# Altium PCB Kay PCB.PcbDoc
Units mil, origin at the board's own origin, x right, y up, seen from the top; angles counter-clockwise.
Board outline 1350 x 1380 mil, 2 copper layers (Top Layer, Bottom Layer); 29 components, 18 nets, 59 pads, 0 vias.
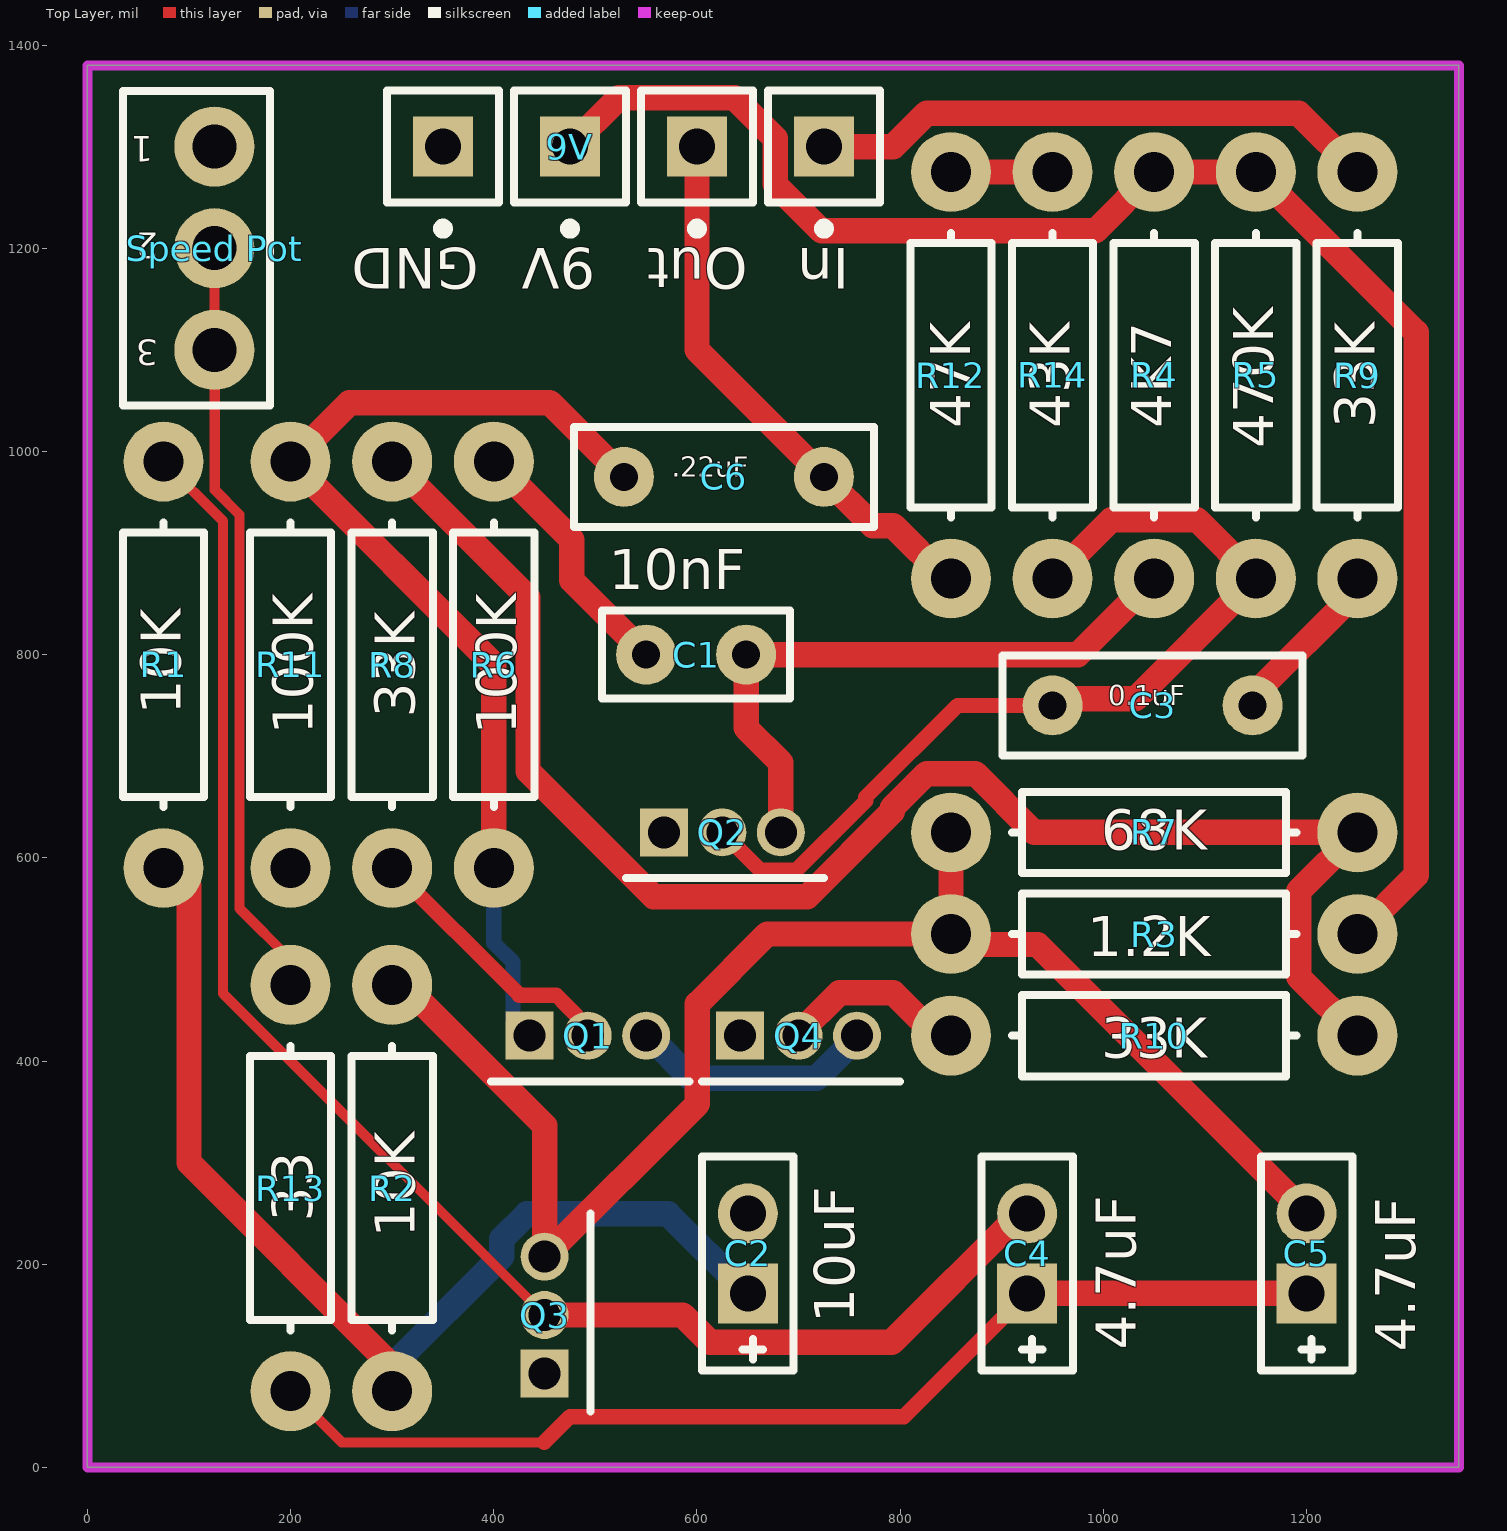
[diagram p0: Top Layer view]
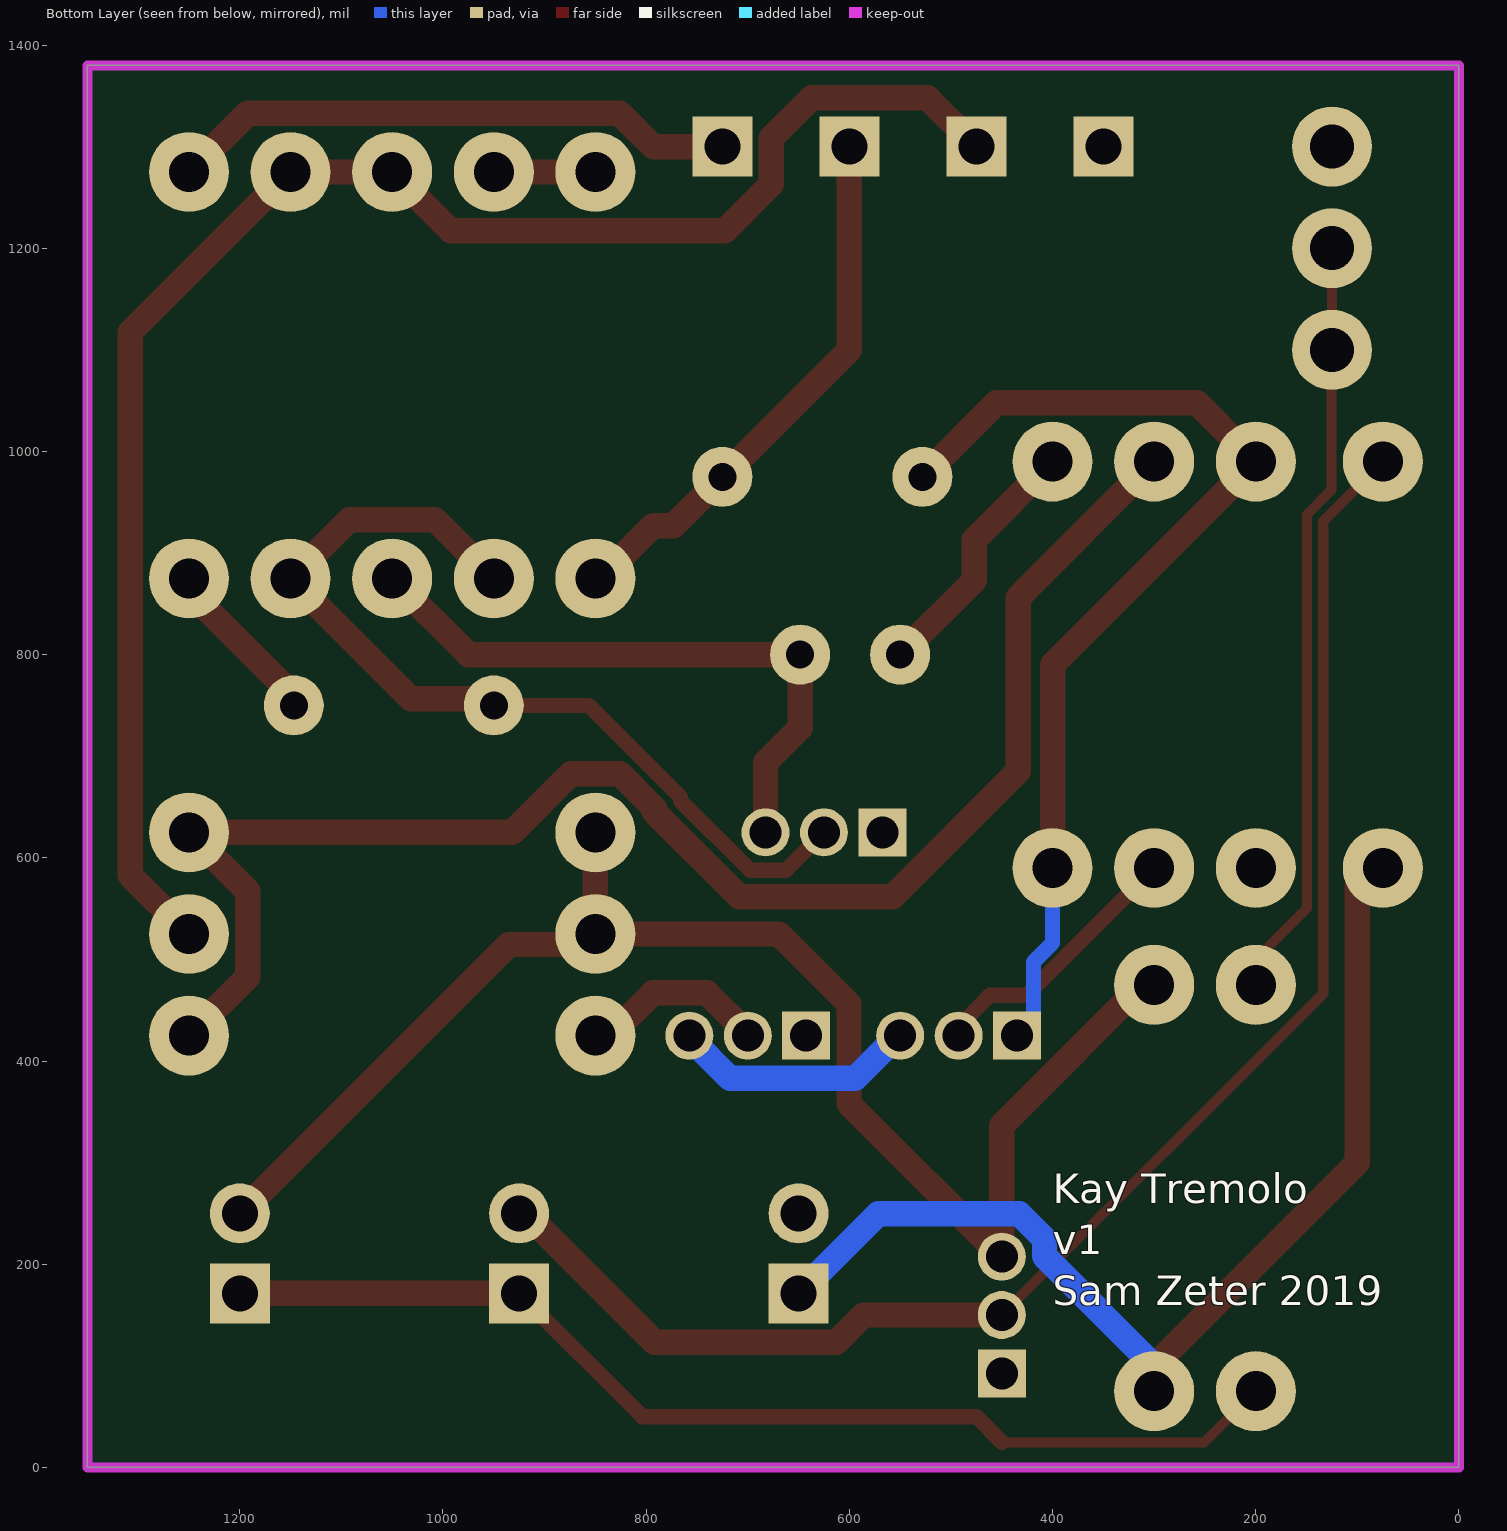
[diagram p1: Bottom Layer view, seen from below]
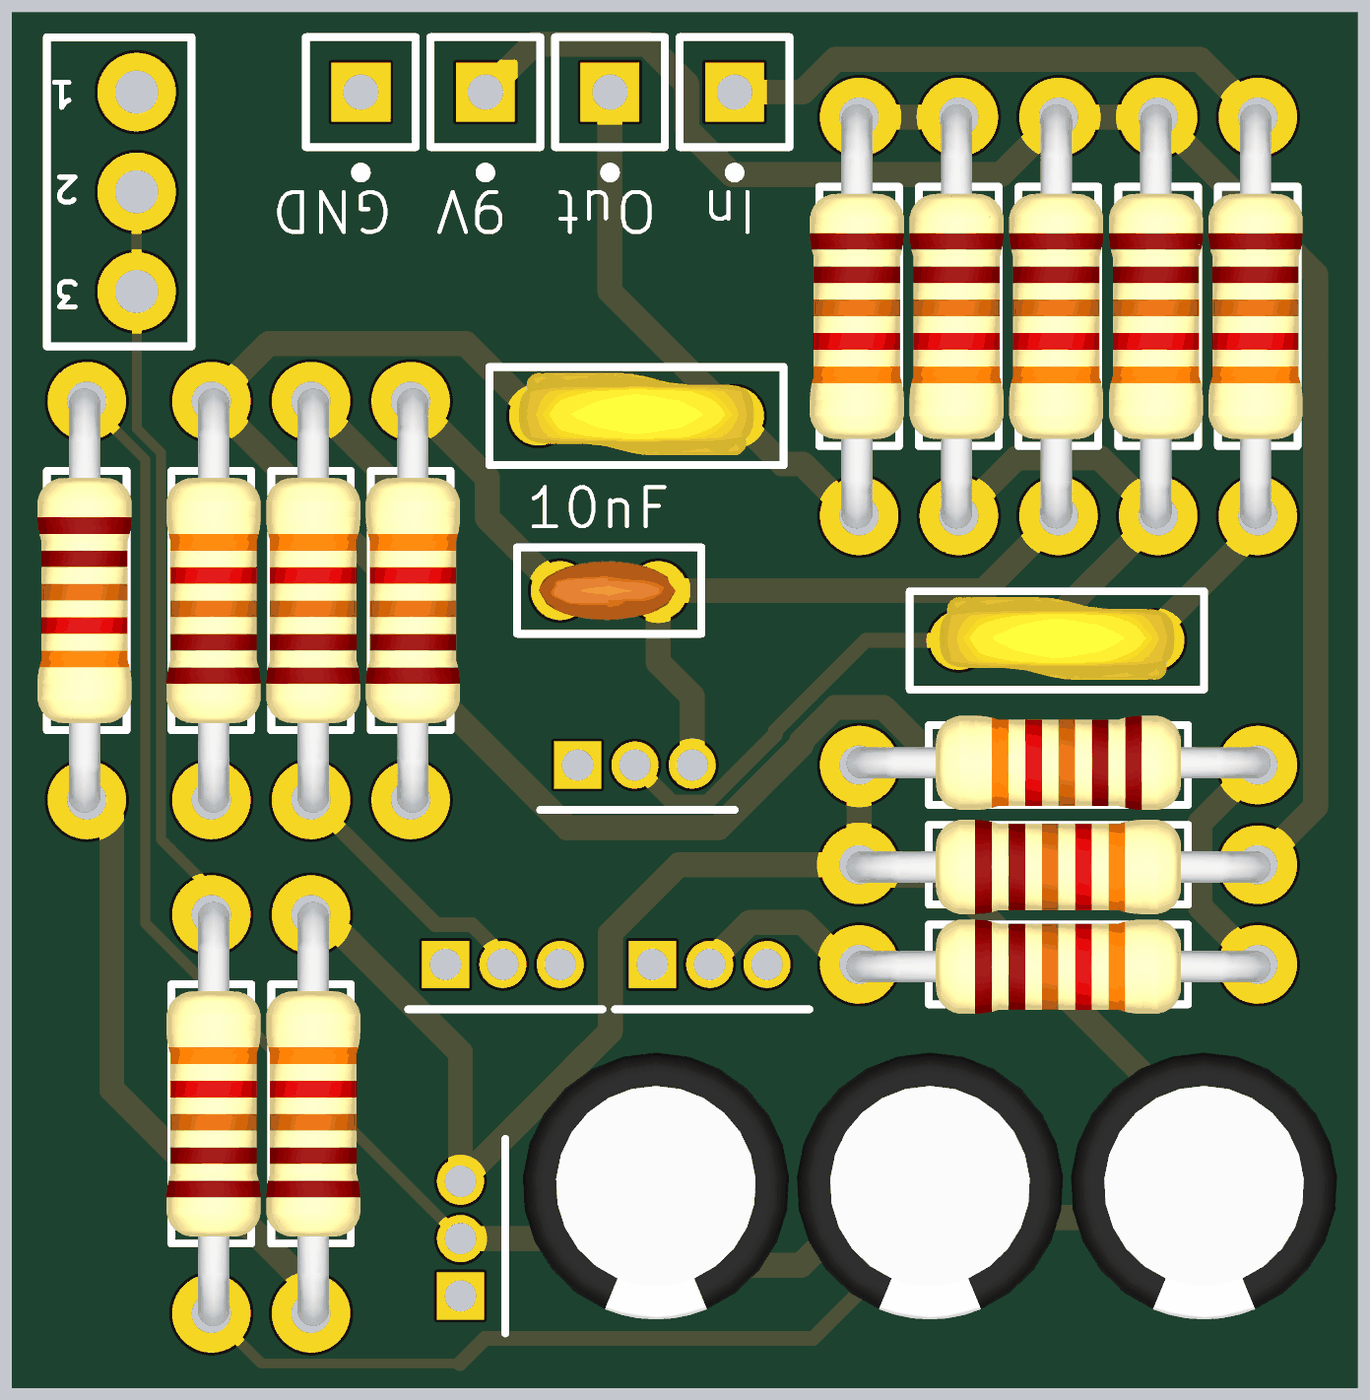
[diagram p2: 3D render of the assembled board from above, using the file's embedded part models]

## Layer stack, top to bottom
Top Solder: solder mask 0.4, Solder Resist, Dk 3.5
Top Layer: signal copper 1.4
Dielectric 1: dielectric 12.6, FR-4, Dk 4.8
Bottom Layer: signal copper 1.4
Bottom Solder: solder mask 0.4, Solder Resist, Dk 3.5

## Board outline
0,0 1350,0 1350,1380 0,1380

## Design rules (kind name [scope] priority, off if disabled: settings)
BoardOutlineClearance [All] p1: gap=15 ignorepadtopadclearanceinfootprint=FALSE
Clearance [All] p1: gap=6 ignorepadtopadclearanceinfootprint=FALSE except(0: Arc-Hole Track-Hole SMDPad-Hole THPad-Hole Via-Hole Fill-Hole Poly-Hole Region-Hole Text-Hole)
ComponentClearance [All] p1: gap=1 collisioncheckmode=3 verticalgap=1 showdistances=FALSE
DiffPairsRouting [All] p1: maxlimit=393.7 minlimit=6 mostfreqgap=8 toplayer_minwidth=6 toplayer_maxwidth=15 toplayer_prefwidth=8 bottomlayer_minwidth=6 bottomlayer_maxwidth=15 bottomlayer_prefwidth=8 maxuncoupledlength=500
HoleSize [All] p1: absolutevalues=TRUE maxlimit=265 minlimit=13 maxpercent=80.000 minpercent=20.000
HoleToHoleClearance [All] p1: gap=10 allowstackedmicrovias=FALSE
MinimumAnnularRing [All] p1: minimumring=7
MinimumSolderMaskSliver [All] p1: minsoldermaskwidth=0
PlaneClearance [All] p1: clearance=10
PlaneConnect [All] p1: planeconnectstyle=Direct reliefexpansion=16 reliefentries=4 reliefconductorwidth=6 reliefairgap=6
PolygonConnect [All] p1: connectstyle=Relief reliefconductorwidth=8 reliefentries=4 polygonreliefangle="90 Angle" airgapwidth=6
RoutingCorners [All] p1: cornerstyle=45-Degree minsetback=49.21 maxsetback=49.21
RoutingVias [All] p1: holewidth=15 width=30 viastyle="Through Hole" minholewidth=13 minwidth=27 maxholewidth=100 maxwidth=114
SilkToSilkClearance [All] p1: silktosilkclearance=0
SilkToSolderMaskClearance [IsPad] p1: minsilkscreentomaskgap=6 clearancetoexposedcopper=TRUE
SolderMaskExpansion [All] p1: expansion=2.95
Width [All] p1: maxlimit=25 minlimit=10 preferedwidth=15 minimp=50.000000 maximp=50.000000 favimp=50.000000
20 further rules are at their usual default settings.

## Components (designator, comment, footprint, x,y, rotation, side; value= is the part's Value field where it differs from the comment)
9V "9V" PIN1 475,1300 r180 top
C1 "10nF" "CAPCER 2.5" 550,800 r0 top
C2 "10uF" "CAPELEC 2" 650,171.26 r90 top
C3 "0.1uF" "CAPCER 5" 950,750 r0 top
C4 "4.7uF" "CAPELEC 2" 925,171.26 r90 top
C5 "4.7uF" "CAPELEC 2" 1200,171.26 r90 top
C6 ".22uF" "CAPCER 5" 528.15,975 r0 top
GND "Plug" PIN1 350,1300 r180 top (schematic designator Ground)
In "In" PIN1 725,1300 r180 top
Out "Plug" PIN1 600,1300 r180 top
Q1 "2N5088G" ONSC-TO-92-3-29-11 492.5,425 r0 top
Q2 "2N5088G" ONSC-TO-92-3-29-11 625,625 r0 top
Q3 "2N5088G" ONSC-TO-92-3-29-11 450,150 r90 top
Q4 "2N5088G" ONSC-TO-92-3-29-11 700,425 r0 top
R1 "10K" "AXIAL 0.4" 75,990 r270 top
R2 "10K" "AXIAL 0.4" 300,75 r90 top
R3 "1.2K" "AXIAL 0.4" 850,525 r0 top value=1K
R4 "4K7" "AXIAL 0.4" 1050,1275 r270 top value=4.7K
R5 "470K" "AXIAL 0.4" 1150,1275 r270 top
R6 "100K" "AXIAL 0.4" 400,590 r90 top
R7 "68K" "AXIAL 0.4" 1250,625 r180 top
R8 "33K" "AXIAL 0.4" 300,590 r90 top
R9 "33K" "AXIAL 0.4" 1250,1275 r270 top
R10 "33K" "AXIAL 0.4" 850,425 r0 top
R11 "100K" "AXIAL 0.4" 200,590 r90 top
R12 "47K" "AXIAL 0.4" 850,1275 r270 top
R13 "33" "AXIAL 0.4" 200,75 r90 top
R14 "43K" "AXIAL 0.4" 950,1275 r270 top
"Speed Pot" "1K" POTENTIOMETER 125,1200 r180 top

## Footprints (in the part's own frame and the unit in brackets; to place one, negate y for a bottom-side part, rotate by r counter-clockwise, add the part's x,y. Pads: shape width x height; smd on the part's side, far side on the other; paste and mask are expansions set on the pad)
"AXIAL 0.4" [mm]
  round 2 hole 1: 1(0,0) 2(10.16,0)
  silkscreen extent 1.52,-1.02 8.64,1.02, body extent -0.32,-1.26 10.48,1.14, height 3.1
"CAPCER 2.5" [mm]
  round 1.5 hole 0.7: 1(0,0) 2(2.5,0)
  silkscreen extent -1.1,-1.1 3.6,1.1, body extent -0.55,-0.75 2.95,0.75, height 4.5
"CAPCER 5" [mm]
  round 1.5 hole 0.7: 1(0,0) 2(5,0)
  silkscreen extent -1.25,-1.25 6.25,1.25, body extent -0.5,-1 5.5,1.1, height 8.1
"CAPELEC 2" [mm]
  rect 1.5x1.5 hole 0.9: 1(0,0)
  round 1.5 hole 0.9: 2(2,0)
  silkscreen extent -1.93,-1.14 3.43,1.14, body extent -2.6,-3.3 4.2,3.5, height 12.2
ONSC-TO-92-3-29-11 [mm] "TO, 3-Leads, Body Dia 4.7mm, Pitch 1.27mm"
  rect 1.2x1.2 hole 0.8: 1(-1.46,0)
  round 1.2 hole 0.8: 2(0,0) 3(1.461,0)
  silkscreen extent -2.41,-1.14 2.54,-1.14, body extent -2.42,-1.34 2.29,2.35, height 7.87
PIN1 [mm] "Connector; Plug"
  rect 1.5x1.5 hole 0.9: 1(0,0)
  silkscreen extent -1.4,-1.4 1.4,2.17
POTENTIOMETER [mm] "Normal Pinout"
  round 2 hole 1.1: 1(0,-2.54) 2(0,0) 3(0,2.54)
  silkscreen extent -1.4,-3.94 2.29,3.94

## Part data
9V In: library part Plug, "Plug", LatestRevisionDate=17-Jul-2002, LatestRevisionNote="Re-released for DXP Platform.", Publisher="Altium Limited"
C1: library part "CapCer 2.5mm", "Ceramic Capactiro 2.5mm spaced leads"
C2 C4 C5: library part "CapElec 2mm", "2mm Lead Spaced Electro Cap"
C3 C6: library part "CapCer 5mm", "5mm Spaced Ceramic Capacitor Leads"
Q1 Q2 Q3 Q4: "Amplifier Transistor, NPN Silicon, 3-Pin TO-92, Pb-Free, Bulk Box", Manufacturer="On Semiconductor", Supplier Part Number 1=42K3133, ComponentLink1Description="Manufacturer URL", ComponentLink1URL=http://www.onsemi.com/, ComponentLink2Description=Datasheet, ComponentLink2URL=http://www.onsemi.com/pub_link/Collateral/2N5088-D.PDF, ComponentLink3Description="Package Specification", ComponentLink3URL=http://www.onsemi.cn/pub_link/Collateral/2N6426-D.PDF, DatasheetVersion="Rev. 4", fT Min (MHz)=50, IC Continuous (A)=0.05, Mounting Technology="Through Hole", PackageDescription="3-Pin Transistor Outline, Body 4.825 x 3.685 mm, Pitch 1.27 mm", PackageReference=TO-92-3-29-11_AM_SL, PackageVersion="Rev. AM", Packing="Bulk Box", PartNumber=2N5088G, Polarity=NPN, RoHS=TRUE, Supplier 1=Newark, Supplier 2=Mouser, Supplier Part Number 2=863-2N5088G
R1 R2 R3 R4 R5 R6 R7 R8 R9 R10 R11 R12 R13 R14: library part "Res 0.4", "TH Resistor 1/4 WATT", LatestRevisionDate=17-Jul-2002, LatestRevisionNote="Re-released for DXP Platform.", PackageDescription="Axial Device, Thru-Hole; 2 Leads; 0.3 in Pin Spacing", PackageReference=AXIAL-0.3, Published=8-Jun-2000, Publisher="Altium Limited"
"Speed Pot": library part Potentiometer_1, "My Own"
GND Out: LatestRevisionDate=17-Jul-2002, LatestRevisionNote="Re-released for DXP Platform.", Publisher="Altium Limited"

## Nets (pads, with @x,y where several pads share a name; then routed paths per layer and width w, separated by ;. In a path a pad name is that pad's centre, name@x,y a point inside that pad or via, vN(x,y) a via of type N, cw(c..) or ccw(c..) an arc to the next point about the centre after c; other vN are vias at no path point)
GND: "Speed Pot.1" C2.2 GND.1 Q2.1 Q3.1 Q4.1 R11.1 R12.1 R14.1 | length 100
  Top Layer w25: R12.1 R14.1
Net9V_1: 9V.1 R3.2 R4.1 R5.1 | length 1639.1
  Top Layer w25: 9V.1 523.03,1348.03 637.19,1348.03 676.97,1308.25 676.97,1262.81 722.65,1217.13 992.13,1217.13 R4.1 R5.1 1307.87,1117.13 1307.87,582.87 R3.2
NetC1_1: C1.1 R6.2 | length 262.1
  Top Layer w25: R6.2@400,1000 R6.2 476.88,913.12 476.88,873.12 C1.1
NetC1_2: C1.2 Q2.3 R4.2 | length 624.9
  Top Layer w25: Q2.3@675,625 682.5,632.5 682.5,693.86 648.42,727.94 C1.2 975,800 R4.2
NetC2_1: C2.1 R1.2 R2.1 | length 1008.6
  Top Layer w25: R1.2@100,572.9 100,300 R2.1@300,100
  Bottom Layer w25: R2.1@300,100 407.88,207.88 407.88,224.95 432.55,249.62 571.64,249.62 646.26,175 C2.1@650,175
NetC3_1: C3.1 Q2.2 R5.2 R14.2 | length 909.4
  Top Layer w15: Q2.2 662.12,587.88 697.88,587.88 766.13,656.13 766.13,659.74 856.39,750 C3.1
  Top Layer w25: C3.1 956.52,756.52 1031.52,756.52 R5.2 1092.13,932.87 1007.87,932.87 R14.2
NetC3_2: C3.2 R9.2 | length 167.7
  Top Layer w25: C3.2 1146.85,759.22 1250,862.37 R9.2
NetC4_1: C4.1 C5.1 R13.1 | length 1081.6
  Top Layer w10: R13.1 250.37,24.63 449.63,24.63
  Top Layer w15: 449.63,24.63 475,50 803.74,50 C4.1
  Top Layer w25: C4.1 C5.1
NetC4_2: C4.2 Q3.2 R1.1 | length 1543.9
  Top Layer w10: R1.1@75,1000 R1.1 133.63,931.37 133.63,466.37 Q3.2
  Top Layer w25: Q3.2 586.04,150 612.81,123.23 791.75,123.23 918.52,250 C4.2
NetC5_2: C5.2 Q3.3 R2.2 R3.1 R7.2 | length 1507.7
  Top Layer w25: R2.2@300,500 300,486.59 450,336.59 Q3.3 600.38,357.88 600.38,456.28 669.09,525 R3.1 ; R7.2 R3.1 ; C5.2 935.28,514.72 860.28,514.72 R3.1
NetC6_1: C6.1 Q1.1 R6.1 R11.2 | length 1050.5
  Top Layer w25: R6.1@400,600 400,790 R11.2 200,1000 210,1000 257.87,1047.87 455.28,1047.87 C6.1
  Bottom Layer w15: R6.1@400,600 R6.1 400,516.38 418.88,497.5 418.88,441.12 Q1.1
NetC6_2: C6.2 Out.1 R12.2 | length 543.2
  Top Layer w25: Out.1 600,1100 C6.2 773.12,926.88 793.17,926.88 845.06,875 R12.2
NetIn_1: In.1 R9.1 | length 562.6
  Top Layer w25: In.1 793.16,1300 826.03,1332.87 1192.13,1332.87 R9.1
NetQ1_2: Q1.2 R8.1 | length 276
  Top Layer w15: R8.1@300,600 R8.1 425.18,464.82 461.52,464.82 472.12,454.21 472.12,454.1 492.5,433.73 Q1.2
NetQ1_3: Q1.3 Q4.3 | length 243.6
  Bottom Layer w25: Q1.3 552.2,425 594.32,382.88 717.45,382.88 757.5,422.93 Q4.3
NetQ4_2: Q4.2 R10.1 | length 186.1
  Top Layer w25: Q4.2 700,427.07 740.05,467.12 793.34,467.12 835.46,425 R10.1
NetR7_1: R7.1 R8.2 R10.2 | length 1561.6
  Top Layer w25: R8.2@300,1000 R8.2 433.75,856.25 433.75,685.34 557.22,561.88 708.65,561.88 792.13,645.36 792.13,648.97 826.03,682.87 873.97,682.87 931.84,625 R7.1 1192.13,567.13 1192.13,482.87 R10.2
NetR13_2: "Speed Pot.2" "Speed Pot.3" R13.2 | length 741.4
  Top Layer w10: 100,1200 125,1175 125,1100 125.37,1099.63 125.37,962.26 149.63,938 149.63,550.37 R13.2@200,500

## Keep-outs
Keep-Out Layer:
  the board outline again, w10

## Silkscreen, mask and mechanical layers (free items; w line width, h text height)
Bottom Overlay:
  text "Kay Tremolo / v1 / Sam Zeter 2019" at 400,150 h50

## Text inside footprints (layer, text, board x,y; h text height)
"Speed Pot": Top Overlay "1" at 65,1310 h25 r180; Top Overlay "2" at 70,1215 h25 r180; Top Overlay "3" at 70,1110 h25 r180